# Altium PCB RP2040.PcbDoc
Units mm, origin at the board's own origin, x right, y up, seen from the top; angles counter-clockwise.
Board outline 27.31 x 37.21 mm, 2 copper layers (Top Layer, Bottom Layer); 48 components, 57 nets, 201 pads, 36 vias.
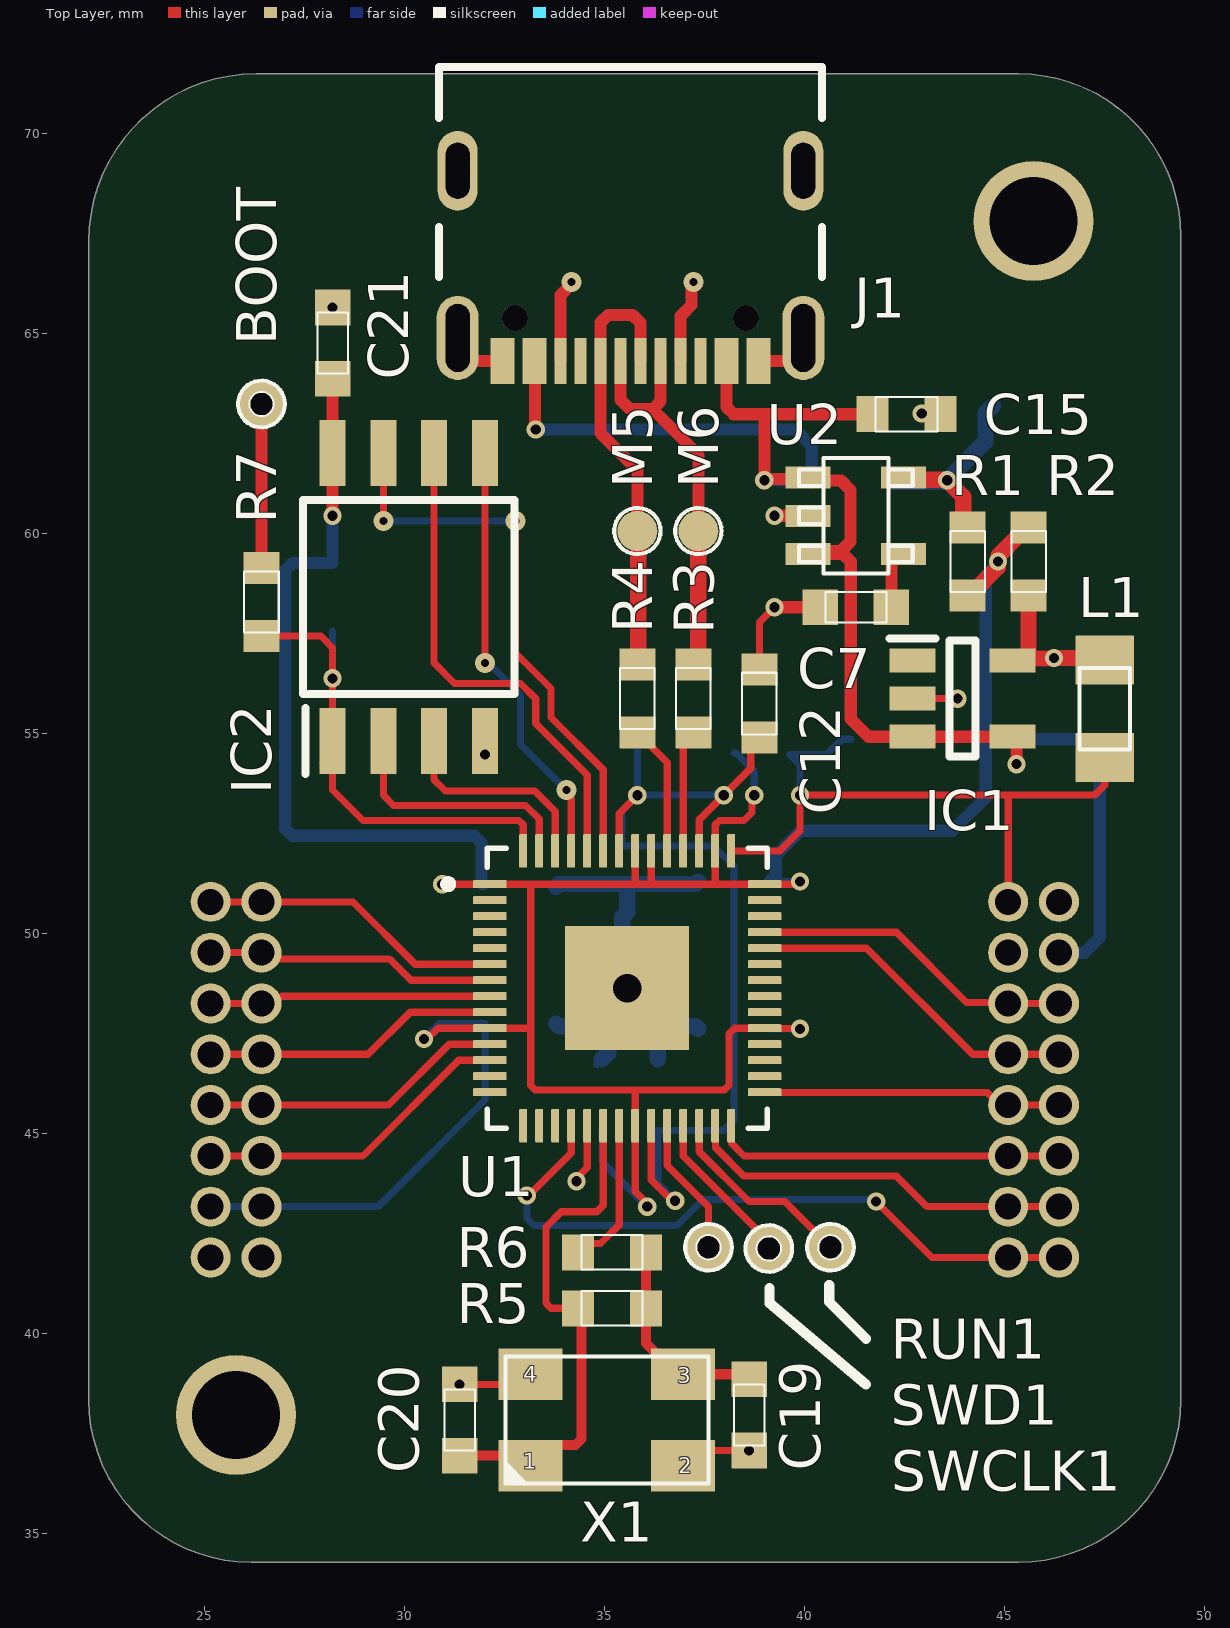
[diagram p0: Top Layer view]
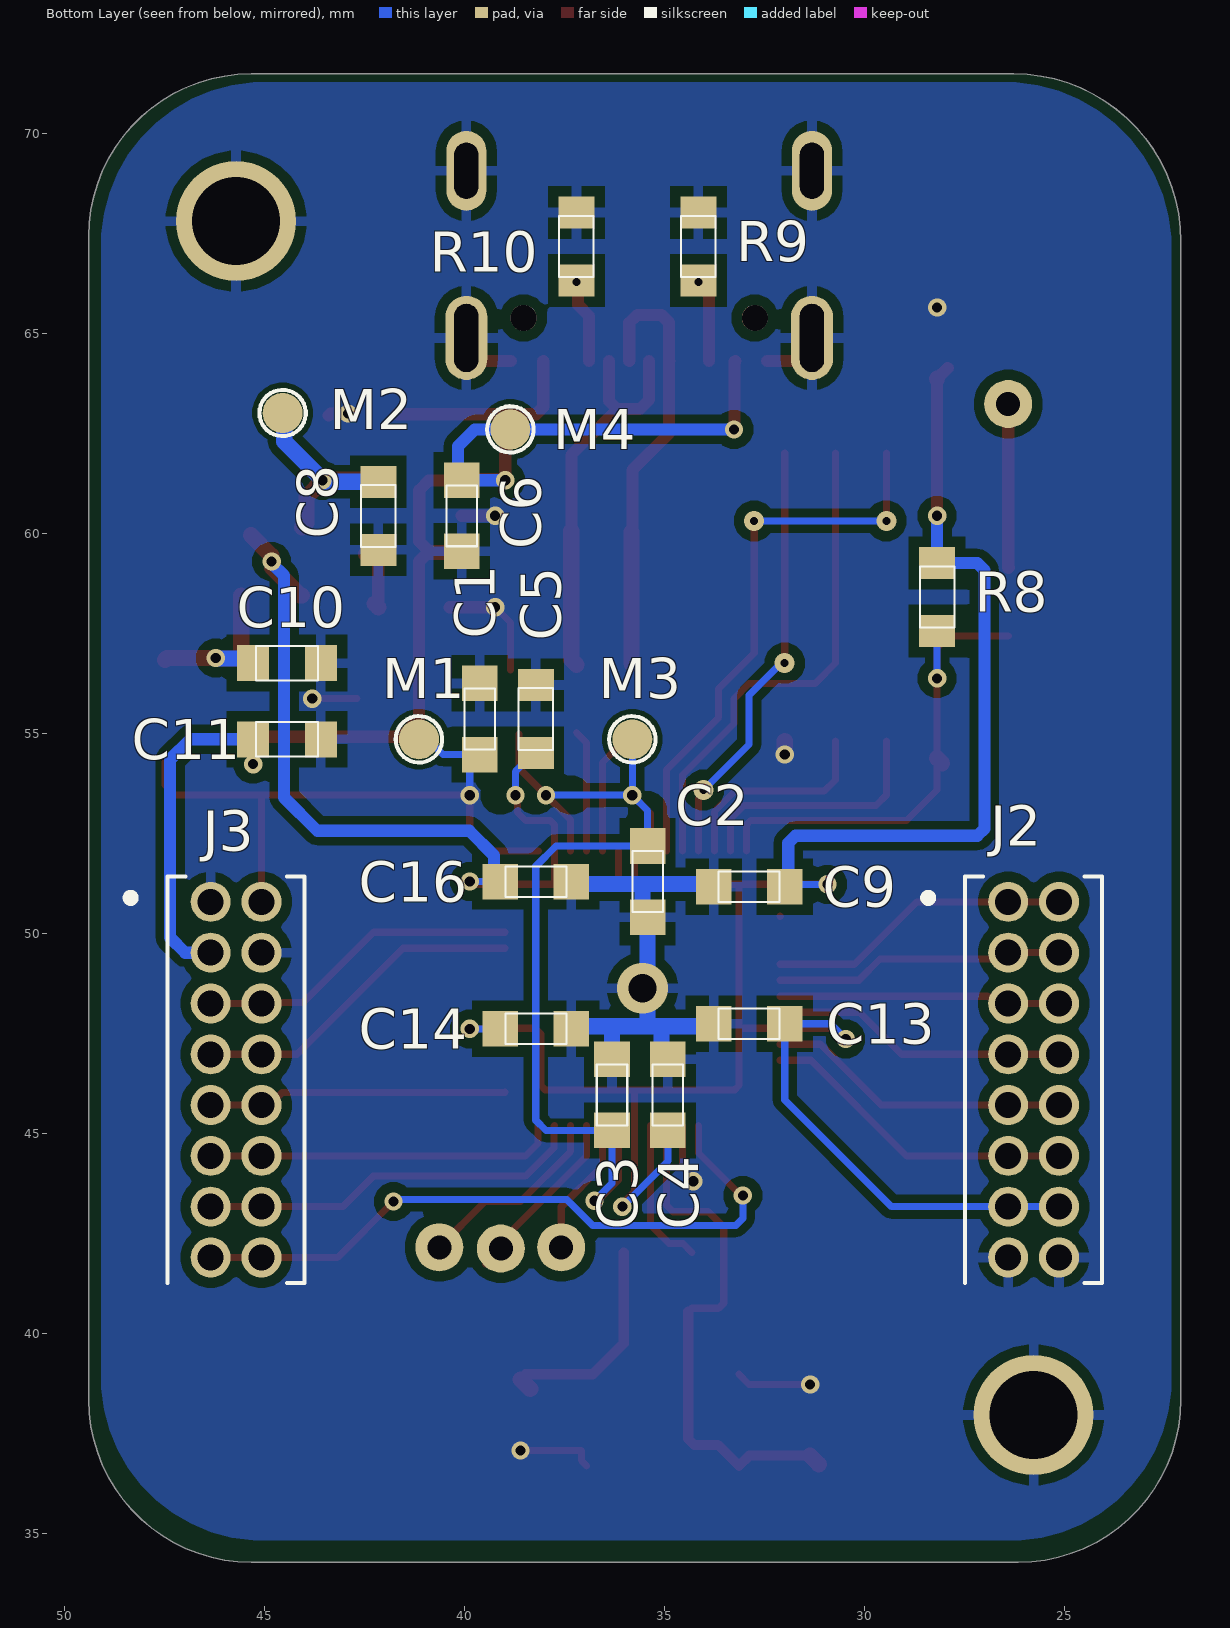
[diagram p1: Bottom Layer view, seen from below]
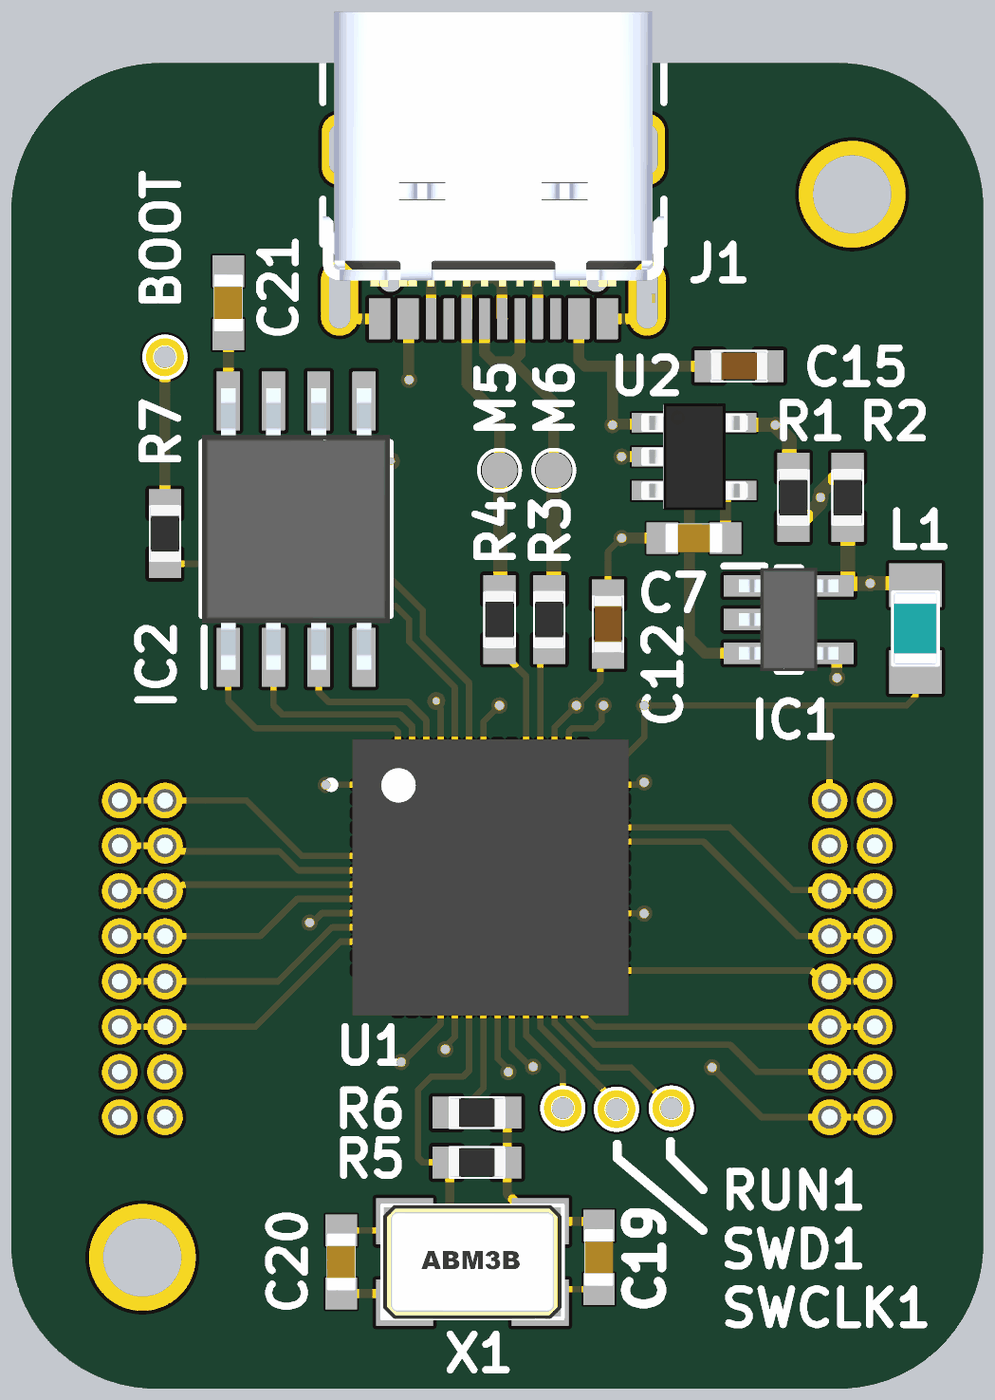
[diagram p2: 3D render of the assembled board from above, using the file's embedded part models]
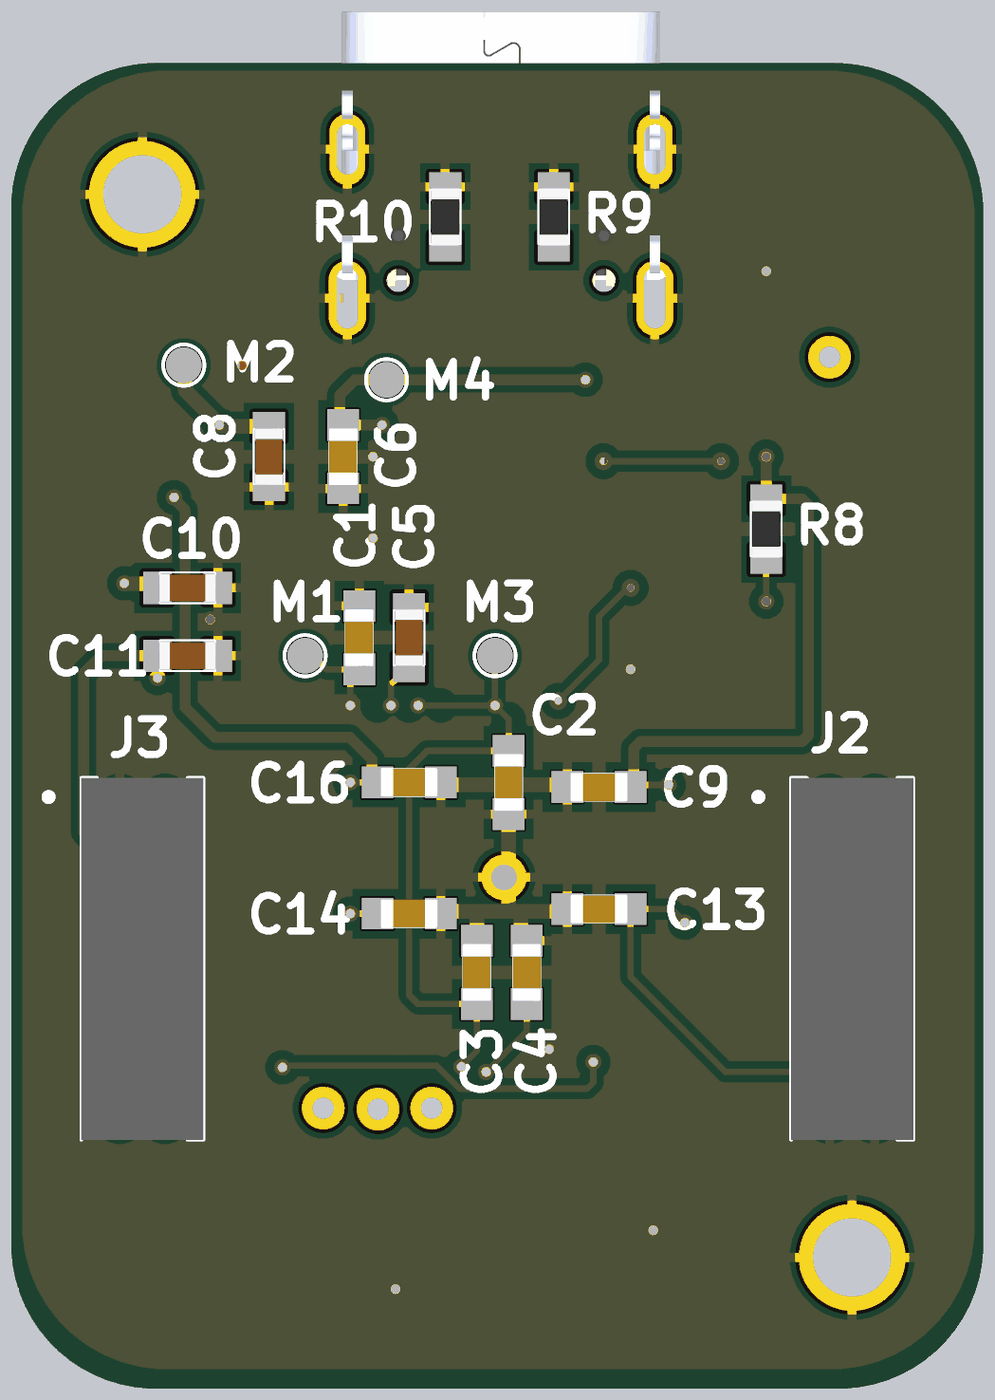
[diagram p3: 3D render of the assembled board from below, using the file's embedded part models]

## Layer stack, top to bottom
Top Solder: solder mask 0.0102, Solder Resist, Dk 3.5
Top Layer: signal copper 0.0356
Dielectric 1: dielectric 0.32, FR-4, Dk 4.8
Bottom Layer: signal copper 0.0356
Bottom Solder: solder mask 0.0102, Solder Resist, Dk 3.5

## Board outline
26.289,71.501 45.339,71.501 cw(c45.339,67.437) 49.403,67.437 49.403,38.354 cw(c45.339,38.354) 45.339,34.29 26.162,34.29 cw(c26.162,38.354) 22.098,38.354 22.098,67.31 cw(c26.289,67.31)

## Design rules (kind name [scope] priority, off if disabled: settings)
Clearance [All] p1: gap=0.254 ignorepadtopadclearanceinfootprint=FALSE except(0.127: Arc-Arc Arc-Track Arc-SMDPad Arc-Via Track-Track Track-SMDPad Track-Via SMDPad-SMDPad; 0.203: Arc-Fill Arc-Poly Arc-Region Arc-Text Track-Fill Track-Poly Track-Region Track-Text SMDPad-Text SMDPad-Hole THPad-Text Via-Text Fill-Text Poly-Text Region-Text Text-Text)
HoleSize [All] p1: absolutevalues=TRUE maxlimit=2.54 minlimit=0.254 maxpercent=80.000 minpercent=20.000
PolygonConnect [All] p1: connectstyle=Relief reliefconductorwidth=0.254 reliefentries=4 polygonreliefangle="90 Angle" airgapwidth=0.254
RoutingVias [All] p1: holewidth=0.2 width=0.5 viastyle="Through Hole" minholewidth=0.2 minwidth=0.5 maxholewidth=0.711 maxwidth=1.27
SilkToSilkClearance [All] p1: silktosilkclearance=0.127
SolderMaskExpansion [All] p1: expansion=0.102 istentingtop=FALSE
UnRoutedNet [All] p1: checkbadconnections=TRUE
Width [All] p1: maxlimit=1.016 minlimit=0.127 preferedwidth=0.406 minimp=50.000000 maximp=50.000000 favimp=50.000000
27 further rules are at their usual default settings.

## Components (designator, comment, footprint, x,y, rotation, side; value= is the part's Value field where it differs from the comment)
BOOT "TP" Pad0.6mm 26.416,63.246 r90 top
C1 "100n" C0603M 39.624,55.372 r90 bottom value=100n/16V
C2 "100n" C0603M 35.433,51.308 r270 bottom value=100n/16V
C3 "100n" C0603M 36.322,45.974 r90 bottom value=100n/16V
C4 "100n" C0603M 34.925,45.974 r270 bottom value=100n/16V
C5 "4u7" C0603 38.227,55.372 r270 bottom value=4u7/6,3V
C6 "100n" C0603M 40.081,60.452 r270 bottom value=100n/16V
C7 "10n" C0603M 41.275,58.166 r180 top
C8 "4u7" C0603 42.164,60.452 r270 bottom value=4u7/6,3V
C9 "100n" C0603M 32.893,51.181 r180 bottom value=100n/16V
C10 "4u7" C0603 44.45,56.769 r180 bottom value=4u7/6,3V
C11 "4u7" C0603 44.45,54.864 r180 bottom value=4u7/6,3V
C12 "4u7" C0603 38.862,55.753 r90 top value=4u7/6,3V
C13 "100n" C0603M 32.893,47.752 r180 bottom value=100n/16V
C14 "100n" C0603M 38.227,47.625 r0 bottom value=100n/16V
C15 "4u7" C0603 42.545,62.992 r0 top value=4u7/6,3V
C16 "100n" C0603M 38.227,51.308 r0 bottom value=100n/16V
C19 "27p" C0603M 38.608,37.973 r270 top value=22p
C20 "27p" C0603M 31.369,37.846 r90 top value=22p
C21 "100n" C0603M 28.194,64.77 r90 top value=100n/16V
IC1 "REF4132B30DBVR" SOT95P280X145-5N 43.942,55.88 r0 top
IC2 "W25Q64JVSSIQ" SOIC127P790X216-8N 30.099,58.42 r90 top
J1 "USB4105-GF-A" GCT_USB4105-GF-A 35.642,69.078 r180 top
J2 "20021111-00016T4LF" 2002111100016T4LF 26.416,50.8 r270 bottom locked
J3 "20021111-00016T4LF" 2002111100016T4LF 46.355,50.8 r270 bottom locked
L1 "1000ohm/100MHz" L0805M 47.498,55.626 r270 top
M1 "TP" "Pad 1mm SMD" 41.148,54.864 r180 bottom
M2 "TP" "Pad 1mm SMD" 44.557,63.021 r180 bottom
M3 "TP" "Pad 1mm SMD" 35.814,54.864 r180 bottom
M4 "TP" "Pad 1mm SMD" 38.862,62.611 r180 bottom
M5 "TP" "Pad 1mm SMD" 35.814,60.071 r180 top
M6 "TP" "Pad 1mm SMD" 37.338,60.071 r180 top
R1 "0R" R0603 44.069,59.309 r90 top
R2 "0R" R0603 45.593,59.309 r90 top
R3 "27R" R0603 37.211,55.88 r270 top
R4 "27R" R0603 35.814,55.88 r270 top
R5 "1M" R0603 35.179,40.64 r0 top
R6 "1K" R0603 35.179,42.037 r0 top
R7 "1K" R0603 26.416,58.293 r270 top
R8 "10K" R0603 28.194,58.42 r270 bottom
R9 "5K1" R0603 34.163,67.183 r270 bottom
R10 "5K1" R0603 37.211,67.183 r90 bottom
RUN1 "TP" Pad0.6mm 40.64,42.164 r90 top
SWCLK1 "TP" Pad0.6mm 37.592,42.164 r90 top
SWD1 "TP" Pad0.6mm 39.1,42.134 r90 top
U1 "RP2040" QFN40P700X700X90-57N 35.56,48.641 r0 top
U2 "LP2985AIM5-3.3" SOT23-5 41.275,60.452 r270 top
X1 "12MHz" XTAL_SMD_5032_4PIN 35.052,37.846 r0 top

## Footprints (in the part's own frame and the unit in brackets; to place one, negate y for a bottom-side part, rotate by r counter-clockwise, add the part's x,y. Pads: shape width x height; smd on the part's side, far side on the other; paste and mask are expansions set on the pad)
2002111100016T4LF [mm]
  round 1 hole 0.65: 1(0,0) 2(0,1.27) 3(1.27,0) 4(1.27,1.27) 5(2.54,0) 6(2.54,1.27) 7(3.81,0) 8(3.81,1.27) 9(5.08,0) 10(5.08,1.27) 11(6.35,0) 12(6.35,1.27) 13(7.62,0) 14(7.62,1.27) 15(8.89,0) 16(8.89,1.27)
  silkscreen extent -0.64,-2.1 9.53,2.35, body extent -0.64,-1.08 9.53,2.35, height 5.6
C0603 [mm] "Chip Capacitor 0603"
  rect 0.8x0.9 smd: 1(-0.85,0) 2(0.85,0)
  silkscreen extent -0.77,-0.43 0.77,0.43, body extent -0.8,-0.4 0.8,0.4, height 0.6
C0603M [mil]
  rect 35x35 smd mask+2: 1(-35,0) 2(35,0)
  silkscreen extent -30,-15 30,15, body extent -31,-16 31,16, height 35
GCT_USB4105-GF-A [mm]
  rect 0.6x1.15 smd: A1_B12(-3.2,4.755) A4_B9(-2.4,4.755) B1_A12(3.2,4.755) B4_A9(2.4,4.755)
  rect 0.3x1.15 smd: A5(-1.25,4.755) A6(-0.25,4.755) A7(0.25,4.755) A8(1.25,4.755) B5(1.75,4.755) B6(0.75,4.755) B7(-0.75,4.755) B8(-1.75,4.755)
  oval 1.05x2.1 hole 0.6 slot 1.7 at 90 deg: S1(-4.32,4.18) S4(4.32,4.18)
  oval 1x2 hole 0.6 slot 1.4 at 90 deg: S2(-4.32,0) S3(4.32,0)
  round 0.65 hole 0.65 unplated: ""(-2.89,3.68) ""(2.89,3.68)
  silkscreen extent -4.79,-2.6 4.79,2.65, body extent -4.79,-3.86 4.79,3.86, height 3.31
L0805M [mil] "Chip inductor 0805"
  rect 48x58 smd: 1(-48,0) 2(48,0)
  silkscreen extent -40,-25 40,25, body extent -39,-24 39,24, height 51
Pad0.6mm [mm] "Pad (neosazuje se)"
  round 1.2 hole 0.6: 1(0,0)
  silkscreen extent -0.58,-0.58 0.58,0.58
"Pad 1mm SMD" [mm] "Pad (neosazuje se)"
  round 1 smd mask+0.051: 1(0,0)
  silkscreen extent -0.58,-0.58 0.58,0.58
QFN40P700X700X90-57N [mm]
  rrect25% 0.84x0.2 smd: 1(-3.435,2.6) 2(-3.435,2.2) 3(-3.435,1.8) 4(-3.435,1.4) 5(-3.435,1) 6(-3.435,0.6) 7(-3.435,0.2) 8(-3.435,-0.2) 9(-3.435,-0.6) 10(-3.435,-1) 11(-3.435,-1.4) 12(-3.435,-1.8) 13(-3.435,-2.2) 14(-3.435,-2.6) 29(3.435,-2.6) 30(3.435,-2.2) 31(3.435,-1.8) 32(3.435,-1.4) 33(3.435,-1) 34(3.435,-0.6) 35(3.435,-0.2) 36(3.435,0.2) 37(3.435,0.6) 38(3.435,1) 39(3.435,1.4) 40(3.435,1.8) 41(3.435,2.2) 42(3.435,2.6)
  rrect25% 0.2x0.84 smd: 15(-2.6,-3.435) 16(-2.2,-3.435) 17(-1.8,-3.435) 18(-1.4,-3.435) 19(-1,-3.435) 20(-0.6,-3.435) 21(-0.2,-3.435) 22(0.2,-3.435) 23(0.6,-3.435) 24(1,-3.435) 25(1.4,-3.435) 26(1.8,-3.435) 27(2.2,-3.435) 28(2.6,-3.435) 43(2.6,3.435) 44(2.2,3.435) 45(1.8,3.435) 46(1.4,3.435) 47(1,3.435) 48(0.6,3.435) 49(0.2,3.435) 50(-0.2,3.435) 51(-0.6,3.435) 52(-1,3.435) 53(-1.4,3.435) 54(-1.8,3.435) 55(-2.2,3.435) 56(-2.6,3.435)
  rect 3.1x3.1 smd paste-0.57: 57(0,0)
  silkscreen extent -4.57,-3.5 3.5,3.5, body extent -3.88,-3.88 3.88,3.88, height 0.9
R0603 [mm] "Chip Resistor 0603"
  rect 0.8x0.9 smd: 1(-0.85,0) 2(0.85,0)
  silkscreen extent -0.76,-0.43 0.76,0.43, body extent -0.8,-0.4 0.8,0.4, height 0.4
SOIC127P790X216-8N [mm]
  rect 1.65x0.65 smd: 1(-3.6,1.905) 2(-3.6,0.635) 3(-3.6,-0.635) 4(-3.6,-1.905) 5(3.6,-1.905) 6(3.6,-0.635) 7(3.6,0.635) 8(3.6,1.905)
  silkscreen extent -4.43,-2.64 2.42,2.64, body extent -3.95,-2.64 3.95,2.64, height 2.16
SOT23-5 [mil] "0,95 rozteè, 0,4mm mezera, 2.9x1,6mm"
  rect 21.65x44 smd mask+2: 1(-37.5,-47) 2(0,-47) 3(37.5,-47) 4(37.5,47) 5(-37.5,47)
  silkscreen extent -57,-56 57,56, body extent -59,-58 59,60, height 57
SOT95P280X145-5N [mm]
  rect 1.15x0.6 smd: 1(-1.25,0.95) 2(-1.25,0) 3(-1.25,-0.95) 4(1.25,-0.95) 5(1.25,0.95)
  silkscreen extent -1.83,-1.45 0.33,1.5, body extent -1.4,-1.45 1.4,1.45, height 1.45
XTAL_SMD_5032_4PIN [mil]
  rect 63x51 smd: 1(-75,-45) 2(75,-45) 3(75,45) 4(-75,45)
  silkscreen extent -100,-62 100,62, body extent -98,-63 98,63, height 44

## Part data
BOOT M1 M2 M3 M4 M5 M6 RUN1 SWCLK1 SWD1: library part "M Point", "Test Point", Category=Pads_Pins_Measure_Points, Main=Mechanical, Stock number=--------
C1 C2 C3 C4 C6 C9 C13 C14 C16 C21: library part UniversalCapacitor, "Ceramic Capacitor X7R", Manufacturer=VISHAY, Part Number="100n/16V X7R C0603", Category="Capacitors CERA SMD", Main=Capacitors, SMD/THD=SMD, Status=X, Stock number=10003450
C5 C10 C11 C12 C15: library part UniversalCapacitor, "Ceramic Capacitor X5R", Manufacturer=Murata, Part Number=GRM188R60J475KE19J, Category="Capacitors CERA SMD", ComponentLink1Description=Datasheet, ComponentLink1URL=http://datasheet.octopart.com/GRM188R60J475KE19J-Murata-datasheet-14401031.pdf, Main=Capacitors, SMD/THD=SMD, Status=T, Stock number=10006168
C7: library part UniversalCapacitor, "Ceramic Capacitor X7R", Manufacturer=VISHAY, Part Number="10n/50V X7R C0603", Category="Capacitors CERA SMD", Main=Capacitors, SMD/THD=SMD, Status=A, Stock number=10002497
C8: library part CMP-UN-000401-1, "Ceramic Capacitor X5R", Manufacturer=Murata, Part Number=GRM188R60J475KE19J, Category="Capacitors CERA SMD", ComponentLink1Description=Datasheet, ComponentLink1URL=http://datasheet.octopart.com/GRM188R60J475KE19J-Murata-datasheet-14401031.pdf, Main=Capacitors, SMD/THD=SMD, Status=T, Stock number=10006168
C19 C20: library part UniversalCapacitor, "Ceramic Capacitor NPO", Manufacturer=VISHAY, Part Number="22p/50V NPO C0603", Category="Capacitors CERA SMD", Main=Capacitors, SMD/THD=SMD, Status=A, Stock number=10004609
IC1: "Integrated Circuit", Manufacturer_Name="Texas Instruments", Datasheet Link=https://www.ti.com/lit/ds/symlink/ref4132.pdf?ts=1621337373445&ref_url=https%253A%252F%252Fwww.ti.com%252Fstore%252Fti%252Fen%252Fp%252Fproduct%252F%253Fp%253DREF4132B33DBVR, Height=1.45mm, Manufacturer_Part_Number=REF4132B30DBVR
IC2: "Integrated Circuit", Manufacturer_Name=Winbond, Mouser2 Part Number=454-W25Q64JVSSIQ, Datasheet Link=https://componentsearchengine.com//W25Q64JVSSIQ.pdf, Height=2.16mm, Manufacturer_Part_Number=W25Q64JVSSIQ, Mouser2 Price/Stock=https://www.mouser.com/Search/Refine.aspx?Keyword=454-W25Q64JVSSIQ
J1: "USB-C (USB TYPE-C) USB 2.0 Receptacle Connector 24 (16+8 Dummy) Position Surface Mount, Right Angle; Through Hole", Package=None, Availability=Warning, Check_prices=https://www.snapeda.com/parts/USB4105-GF-A/Global%20Connector%20Technology/view-part/4423780/?ref=eda, MF=GCT, MP=USB4105-GF-A, Price=None, Purchase-URL=https://pricing.snapeda.com/search/part/USB4105-GF-A/?ref=eda, SnapEDA_Link=https://www.snapeda.com/parts/USB4105-GF-A/Global%20Connector%20Technology/view-part/4423780/?ref=snap
J2 J3: "Connector", Manufacturer_Name=Amphenol, Datasheet Link=https://cdn.amphenol-icc.com/media/wysiwyg/files/drawing/20021111.pdf, Height=5.5mm, Manufacturer_Part_Number=20021111-00016T4LF
L1: library part UniversalInductor, "Ferrite Bead (10 to 200MHz) 0.5A", Manufacturer=TDK, Part Number=MMZ2012R102A, Category="Ferrite Beads", ComponentLink1Description=Datasheet, ComponentLink1URL=http://www.farnell.com/datasheets/84901.pdf, Main=Inductors, SMD/THD=SMD, Status=A, Stock number=10005111
R1: library part CMP-UN-002043-2, "Resistor 1%, 0.1W, 75V", Manufacturer=VISHAY, Part Number="0R R0603", Category="Resistors SMD", Main=Resistors, SMD/THD=SMD, Status=A, Stock number=10005433
R2: library part UniversalResistor, "Resistor 1%, 0.1W, 75V", Manufacturer=VISHAY, Part Number="0R R0603", Category="Resistors SMD", Main=Resistors, SMD/THD=SMD, Status=A, Stock number=10005433
R3 R4: library part UniversalResistor, "Resistor 1%, 0.1W, 75V", Manufacturer="YAGEO (PHYCOMP)", Part Number="27R R0603", Category="Resistors SMD", Main=Resistors, SMD/THD=SMD, Status=A, Stock number=10005475
R5: library part UniversalResistor, "Resistor 1%, 0.1W, 75V", Manufacturer=VISHAY, Part Number="1M0 R0603", Category="Resistors SMD", Main=Resistors, SMD/THD=SMD, Status=A, Stock number=10004745
R6 R7 R9 R10: library part UniversalResistor, "Resistor 1%, 0.1W, 75V", Manufacturer=VISHAY, Part Number="1K R0603", Category="Resistors SMD", Main=Resistors, SMD/THD=SMD, Status=A, Stock number=10004641
R8: library part UniversalResistor, "Resistor 1%, 0.1W, 75V", Manufacturer=VISHAY, Part Number="10K R0603", Category="Resistors SMD", Main=Resistors, SMD/THD=SMD, Status=A, Stock number=10004622
U1: "RP2040 Raspberry Pi Pico - ARMÂ® CortexÂ®-M0+ MCU 32-Bit Embedded Evaluation Board", Package=Package, Availability="In Stock", Check_prices=https://www.snapeda.com/parts/RP2040/Raspberry%20Pi/view-part/5800506/?ref=eda, MF="Raspberry Pi", MP=RP2040, Price=None, Purchase-URL=https://pricing.snapeda.com/search/part/RP2040/?ref=eda, SnapEDA_Link=https://www.snapeda.com/parts/RP2040/Raspberry%20Pi/view-part/5800506/?ref=snap
U2: library part LP2985_SOT25, "150-mA , Low-Dropout Regulator", Manufacturer="Texas Instruments", Part Number=LP2985AIM5-3.3/NOPB, Category="Voltage Regulators", ComponentLink1Description=Datasheet, ComponentLink1URL=http://www.farnell.com/datasheets/1972829.pdf, Main=IC's, SMD/THD=SMD, Status=N, Stock number=10006099
X1: library part Symbol, "Crystal Resonator", Manufacturer=Geyer, Part Number="12.000MHz KX-9A", Category=Crystals, Main=Crystals

## Free pads (board coordinates)
  round 3 hole 2.2: 1(25.781,37.973) 2(45.72,67.818)

## Via types
v1: diameter 0.457, hole 0.254, Top Layer to Bottom Layer, tented both sides, 29 vias
v2: diameter 0.5, hole 0.2, Top Layer to Bottom Layer, tented both sides, 6 vias
v3: diameter 1.27, hole 0.711, Top Layer to Bottom Layer, 1 vias

## Nets (pads, with @x,y where several pads share a name; then routed paths per layer and width w, separated by ;. In a path a pad name is that pad's centre, name@x,y a point inside that pad or via, vN(x,y) a via of type N, cw(c..) or ccw(c..) an arc to the next point about the centre after c; other vN are vias at no path point)
+1.1V: C2.1 C3.1 C12.1 M3.1 U1.23 U1.45 U1.50 | length 25.5
  Top Layer w0.178: U1.50 35.36,53.013 v1(35.814,53.467) ; U1.23 36.16,43.85 36.682,43.328 v1(36.758,43.328) ; U1.45 37.36,52.854 38.647,54.141 C12.1@38.647,54.991
  Bottom Layer w0.178: M3.1 v1(35.814,53.467) ; v1(36.758,43.328) 36.322,43.764 C3.1 37.973,45.085 38.227,45.339 38.227,51.689 37.719,52.197 C2.1 35.433,53.086 v1(35.814,53.467) ; v1(37.973,53.467) 36.511,53.467 v1(35.814,53.467)
+3.3V: C4.2 C5.2 C9.2 C13.2 C14.2 C16.2 C21.1 IC2.8 J2.13 J2.14 R1.1 R2.2 R8.1 U1.1 U1.10 U1.22 U1.33 U1.42 U1.44 U1.48 U1.49 | length 83.8
  Top Layer w0.178: v1(30.48,47.371) 30.556,47.371 30.826,47.641 U1.10 33.147,47.641 ; v1(30.937,51.239) v1(30.937,51.239) 32.124,51.24 U1.1 33.147,51.241 ; U1.49 35.76,51.296 35.814,51.241 ; v1(36.062,43.18) 36.062,43.256 35.76,43.558 U1.22 35.76,46.101 ; U1.48 36.16,51.276 36.195,51.241 ; 37.778,51.253 37.76,51.272 37.76,52.728 37.864,52.832 38.481,52.832 38.682,53.033 38.682,53.414 v1(38.735,53.467) ; v1@39.735,51.241 U1.42 37.76,51.241 36.195,51.241 ; v1(39.878,47.625) 39.87,47.633 39.003,47.633 U1.33 38.243,47.641 38.1,47.498 38.1,46.205 37.996,46.101 35.76,46.101 ; 33.147,47.641 33.147,51.241 ; 33.147,47.641 33.147,46.205 33.251,46.101 35.76,46.101 ; 33.147,51.241 35.814,51.241 ; 35.814,51.241 36.195,51.241
  Top Layer w0.305: C21.1@27.927,64.148 C21.1 IC2.8 v1(28.194,60.452)
  Top Layer w0.406: R1.1 44.119,58.459 44.821,59.161 44.821,59.299 v1(44.831,59.309) 44.841,59.319 44.841,59.457 R2.2@45.346,59.962
  Bottom Layer w0.178: J2.14 J2.13 29.337,43.18 32.004,45.847 C13.2 30.861,47.752 v1(30.48,47.371) ; v1(30.937,51.239) 31.946,51.239 C9.2 ; C4.2 34.925,44.317 v1(36.062,43.18) ; C5.2 38.277,54.522 38.735,54.064 v1(38.735,53.467) ; C14.2 v1(39.878,47.625) ; C16.2 v1(39.878,51.308)
  Bottom Layer w0.305: v1(28.194,60.452) R8.1 27.191,59.27 27.012,59.091 27.012,52.63 27.191,52.451 31.737,52.451 31.916,52.272 31.916,51.269 C9.2@31.946,51.239 ; C16.2 39.272,51.464 39.272,51.959 39.891,52.578 43.688,52.578 44.522,53.412 44.522,58.959 44.831,59.268 v1(44.831,59.309)
GND: C1.2 C2.2 C3.2 C4.1 C5.1 C6.2 C7.2 C8.2 C9.1 C10.2 C11.2 C12.2 C13.1 C14.1 C15.2 C16.1 C19.2 C20.2 C21.2 IC1.2 IC2.4 J1.A1_B12 J1.B1_A12 J1.S1 J1.S2 J1.S3 J1.S4 J2.15 J2.16 J3.1 J3.4 pad.1 pad.2 R9.1 R10.2 U1.19 U1.57 U2.2 X1.2 X1.4 | length 26.8
  Top Layer w0.178: J1.S4 31.322,64.726 J1.S4@31.725,64.323 ; v1(31.369,38.735) 32.893,38.735 X1.4 ; v1(34.29,43.815) 34.29,43.891 34.56,44.16 U1.19 ; X1.2 37.084,36.83 37.084,37.084 v1(38.608,37.084) ; C12.2 38.862,57.785 v1(39.243,58.166) ; J1.S1@39.559,64.323 39.962,64.726 J1.S1 ; IC1.2 v1(43.815,55.88) ; J3.4@44.974,49.641 J3.4
  Top Layer w0.3: J1.S4@31.725,64.323 J1.B1_A12 ; J1.A1_B12 J1.S1@39.559,64.323
  Top Layer w0.305: v1(39.243,58.166) C7.2 ; v1(39.243,60.452) U2.2 ; v1(42.922,63.011) 42.932,63.002 43.36,63.002 C15.2@43.405,62.957
  Top Layer w0.406: v1(32.004,54.483) IC2.4
  Bottom Layer w0.178: C4.1@34.798,46.736 C4.1
  Bottom Layer w0.406: C13.1 33.845,47.688 35.084,47.688 ; C9.1 33.845,51.244 35.56,51.244 ; C4.1 35.084,47.022 35.084,47.688 ; C3.2 36.322,47.688 ; C14.1 37.274,47.688 36.322,47.688 ; C16.1 37.274,51.244 35.56,51.244 ; 35.084,47.688 35.433,47.688 ; 35.433,47.689 C2.2 35.56,50.546 35.56,51.244 ; 35.433,47.688 36.322,47.688
  other v1: 28.194,65.659
  other v3: 35.56,48.641
NetBOOT_1: BOOT.1 R7.1 | length 4.1
  Top Layer w0.305: R7.1@26.397,59.163 R7.1 BOOT.1
NetC7_1: C7.1 U2.4 | length 1.7
  Top Layer w0.305: C7.1 U2.4@42.164,59.428
  Top Layer w0.406: C7.1 C7.1@42.253,58.255 ; U2.4@42.164,59.428 42.236,59.499 U2.4
NetC8_1: C8.1 M2.1 R1.2 U2.5 | length 6.3
  Top Layer w0.406: U2.5 42.522,61.351 43.551,61.351 v1(43.561,61.341) 43.561,61.327 43.958,60.931 43.958,60.27 R1.2
  Bottom Layer w0.406: C8.1 43.508,61.302 43.547,61.341 v1(43.561,61.341) 43.561,61.355 44.514,62.308 44.514,63.015 M2.1@44.704,63.206
NetC10_1: C10.1 IC1.5 L1.1 R2.1 | length 4.9
  Top Layer w0.406: IC1.5 45.248,56.886 IC1.5@45.523,56.886 ; R2.1 45.593,56.956 IC1.5@45.523,56.886 ; L1.1 47.447,56.896 v1(46.228,56.896) 46.218,56.886 IC1.5@45.523,56.886
  Bottom Layer w0.406: C10.1 45.417,56.886 46.218,56.886 v1(46.228,56.896)
NetC19_1: C19.1 R5.2 R6.2 X1.3 | length 5.6
  Top Layer w0.254: R6.2 R5.2 36.029,39.765 36.805,38.989 X1.3 38.481,38.989 C19.1
  Top Layer w0.406: C19.1@38.367,38.621 C19.1
NetC20_1: C20.1 R5.1 U1.20 X1.1 | length 13.4
  Top Layer w0.178: R5.1@34.417,40.552 R5.1 33.655,40.64 33.528,40.767 33.528,42.672 33.909,43.053 34.798,43.053 34.96,43.215 U1.20
  Top Layer w0.254: C20.1 32.893,36.957 X1.1 33.668,37.224 34.268,37.224 34.417,37.372 R5.1@34.417,40.552
  Top Layer w0.406: C20.1@31.154,36.742 C20.1
NetIC2_1: IC2.1 R7.2 R8.2 U1.56 | length 12.6
  Top Layer w0.178: R7.2 27.901,57.443 28.194,57.15 v1(28.194,56.388) IC2.1 28.194,54.39 28.194,53.594 28.956,52.832 32.856,52.832 32.96,52.728 U1.56
  Top Layer w0.406: IC2.1@28.072,54.268 IC2.1@28.194,54.39
  Bottom Layer w0.178: v1(28.194,56.388) R8.2
NetIC2_2: IC2.2 U1.55 | length 6.3
  Top Layer w0.178: IC2.2 29.464,53.467 29.718,53.213 33.02,53.213 33.36,52.873 U1.55
NetIC2_3: IC2.3 U1.54 | length 5.3
  Top Layer w0.178: IC2.3 30.734,53.848 31.014,53.568 33.247,53.568 33.76,53.055 U1.54
NetIC2_5: IC2.5 U1.53 | length 10.9
  Top Layer w0.178: v2(32.004,56.769) IC2.5 ; v2(34.036,53.594) 34.036,53.507 34.16,53.383 U1.53
  Bottom Layer w0.178: v2(32.004,56.769) 32.091,56.769 32.893,55.967 32.893,54.737 v2(34.036,53.594)
NetIC2_6: IC2.6 U1.52 | length 12.5
  Top Layer w0.178: IC2.6 30.734,57.023 30.734,56.769 31.242,56.261 32.893,56.261 33.274,55.88 33.274,55.261 34.56,53.975 U1.52
NetIC2_7: IC2.7 U1.51 | length 14.2
  Top Layer w0.178: v2(29.464,60.325) IC2.7 ; v2(32.766,60.325) 32.766,57.023 33.655,56.134 33.655,55.407 34.96,54.102 U1.51
  Bottom Layer w0.178: v2(29.464,60.325) v2(32.766,60.325)
NetJ1_A5: J1.A5 R10.1 | length 2.1
  Top Layer w0.3: J1.A5 36.892,65.444 37.173,65.725 37.173,66.256 v2(37.211,66.294)
  Bottom Layer w0.3: v2(37.211,66.294) R10.1
NetJ1_A6: J1.A6 J1.B6 M5.1 R4.1 | length 11
  Top Layer w0.3: J1.B6 34.892,62.517 35.814,61.595 M5.1
  Top Layer w0.305: J1.B6 34.894,64.325 34.894,65.282 35.086,65.474 35.693,65.474 35.89,65.277 35.89,64.325 J1.A6
  Top Layer w0.406: R4.1@35.836,56.752 M5.1@35.836,60.049
NetJ1_A7: J1.A7 J1.B7 M6.1 R3.1 | length 10.1
  Top Layer w0.3: J1.A7 35.392,63.356 35.629,63.119 36.195,63.119 ; J1.B7 36.392,63.316 36.195,63.119 ; M6.1 37.338,61.976 36.195,63.119
  Top Layer w0.406: R3.1 37.338,56.857 M6.1
NetJ1_B5: J1.B5 R9.2 | length 2.1
  Top Layer w0.3: J1.B5 33.892,65.969 34.163,66.24 v2(34.163,66.294)
  Bottom Layer w0.3: v2(34.163,66.294) R9.2
NetJ2_1: J2.1 J2.2 U1.6 | length 7.6
  Top Layer w0.178: J2.2 J2.1 28.702,50.8 30.261,49.241 U1.6
NetJ2_3: J2.3 J2.4 U1.7 | length 7.3
  Top Layer w0.178: J2.4 J2.3 26.573,49.373 29.621,49.373 30.153,48.841 U1.7
NetJ2_5: J2.5 J2.6 U1.8 | length 7.1
  Top Layer w0.178: J2.6 J2.5 26.573,48.417 26.908,48.417 26.931,48.441 U1.8
NetJ2_7: J2.7 J2.8 U1.9 | length 7.4
  Top Layer w0.178: J2.8 J2.7 29.083,46.99 30.134,48.041 U1.9
NetJ2_9: J2.9 J2.10 U1.11 | length 7.6
  Top Layer w0.178: J2.10 J2.9 29.591,45.72 31.112,47.241 U1.11
NetJ2_11: J2.11 J2.12 U1.12 | length 8
  Top Layer w0.178: J2.12 28.956,44.45 31.347,46.841 U1.12
NetJ3_5: J3.5 J3.6 U1.39 | length 8.1
  Top Layer w0.178: U1.39 42.288,50.041 44.041,48.288 45.057,48.288 J3.6 J3.5
NetJ3_7: J3.7 J3.8 U1.38 | length 8.5
  Top Layer w0.178: U1.38 41.545,49.641 44.196,46.99 J3.8 J3.7
NetJ3_9: J3.9 J3.10 U1.29 | length 7.5
  Top Layer w0.178: U1.29 39.006,46.03 44.57,46.03 44.88,45.72 J3.10 J3.9
NetJ3_11: J3.11 J3.12 U1.28 | length 8.8
  Top Layer w0.178: U1.28 38.171,45.195 38.171,44.76 38.481,44.45 J3.12 J3.11
NetJ3_13: J3.13 J3.14 U1.27 | length 9.8
  Top Layer w0.178: U1.27 37.771,45.195 37.771,44.652 38.481,43.942 42.291,43.942 43.053,43.18 J3.14 J3.13
NetJ3_15: J3.15 J3.16 U1.18 | length 17.1
  Top Layer w0.178: v1(33.051,43.459) 33.1,43.459 34.16,44.519 U1.18 ; v1(41.783,43.307) 43.18,41.91 J3.15
  Bottom Layer w0.178: v1(33.051,43.459) 33.051,42.887 33.228,42.71 36.804,42.71 37.452,43.357 41.733,43.357 v1(41.783,43.307)
NetR3_2: R3.2 U1.46 | length 3.1
  Top Layer w0.178: U1.46 36.96,54.779 R3.2
NetR4_2: R4.2 U1.47 | length 3.3
  Top Layer w0.178: R4.2 36.56,54.284 U1.47
NetR6_1: R6.1 U1.21 | length 3.8
  Top Layer w0.178: R6.1 34.55,42.258 34.892,42.258 35.36,42.726 U1.21
NetRUN1_1: RUN1.1 U1.26 | length 4.9
  Top Layer w0.178: U1.26 37.36,44.555 38.608,43.307 39.497,43.307 RUN1.1
NetSWCLK1_1: SWCLK1.1 U1.24 | length 3.5
  Top Layer w0.178: U1.24 36.56,44.212 37.592,43.18 SWCLK1.1
NetSWD1_1: SWD1.1 U1.25 | length 4.2
  Top Layer w0.178: U1.25 36.96,44.447 39.1,42.307 SWD1.1 ; SWD1.1@39.285,41.949 SWD1.1@39.481,41.753
NetU1_2: U1.2 | length 0
  Top Layer w0.178: U1.2@32.114,50.83 U1.2
NetU1_3: U1.3 | length 0
  Top Layer w0.178: U1.3@32.114,50.43 U1.3
NetU1_4: U1.4
NetU1_5: U1.5
NetU1_13: U1.13
NetU1_14: U1.14
NetU1_15: U1.15
NetU1_16: U1.16
NetU1_17: U1.17
NetU1_30: U1.30
NetU1_31: U1.31
NetU1_32: U1.32
NetU1_34: U1.34
NetU1_35: U1.35
NetU1_36: U1.36
NetU1_37: U1.37
NetU1_40: U1.40
NetU1_41: U1.41
VBUS: C6.1 C11.1 C15.1 IC1.3 IC1.4 J1.A4_B9 J1.B4_A9 J3.3 M4.1 U2.1 U2.3 | length 40.9
  Top Layer w0.305: J1.B4_A9 33.258,64.307 33.258,62.627 v1(33.274,62.611) ; J1.A4_B9 38.042,63.171 38.22,62.992 38.989,62.992 ; U2.3 40.957,59.499 41.148,59.309 41.148,55.372 41.59,54.93 IC1.3 IC1.4 45.294,54.828 v1(45.294,54.243) ; U2.3@40.153,59.571 40.905,59.571 41.143,59.809 41.143,61.092 40.902,61.333 U2.1@40.153,61.333 ; U2.1@40.298,61.527 40.175,61.404 U2.1 40.047,61.37 39.018,61.37 v1(38.989,61.341) 38.989,62.992 ; C15.1 38.989,62.992
  Top Layer w0.406: U2.3 U2.3@40.153,59.571 ; U2.1 U2.1@40.153,61.333
  Bottom Layer w0.305: v1(33.274,62.611) M4.1 39.751,62.611 40.171,62.191 40.171,61.431 C6.1 ; v1(38.989,61.341) 39.878,61.341 C6.1@39.98,61.443 ; v1(45.294,54.243) 45.297,54.246 45.297,54.861 C11.1 46.863,54.864 47.371,54.356 47.371,49.911 46.99,49.53 J3.3
VREF: C1.1 J3.2 L1.2 M1.1 U1.43 | length 16.7
  Top Layer w0.178: U1.43 39.376,52.076 39.878,52.578 v1(39.878,53.467) 45.085,53.467 ; J3.2 45.085,53.467 ; L1.2 47.498,53.721 47.244,53.467 45.085,53.467
  Bottom Layer w0.178: v1(39.878,53.467) 39.878,54.229 C1.1 40.544,54.483 40.925,54.864 M1.1
pads on no net: IC1.1 J1. J1.A8 J1.B8

## Polygon pours and split planes (outlines as drawn)
GND on Bottom Layer "GND_L02_P000" (solid, pour order 0): 49.091,67.222 49.091,38.901 cw(c45.027,38.901) 45.027,34.837 26.358,34.837 cw(c26.358,38.849) 22.346,38.849 22.346,67.147 cw(c26.485,67.147) 26.485,71.286 45.027,71.286 cw(c45.027,67.222)

## Silkscreen, mask and mechanical layers (free items; w line width, h text height)
Top Overlay:
  lines w0.254: 39.116,41.148 39.116,40.767 41.529,38.735 ; 40.617,41.225 40.611,41.218 40.611,40.796 41.529,39.878
Mechanical 13:
  text "GPIO4" at 19.253,50.43 h1
  text "VREF" at 49.631,50.165 h1
  text "GND" at 52.268,50.176 h1
  text "GPIO5" at 19.25,49.287 h1
  text "USB_5V" at 52.3,49.2 h1
  text "GND" at 49.728,49.16 h1
  text "GPIO6" at 19.252,47.89 h1
  text "GPIO27" at 49.738,47.89 h1
  text "GPIO7" at 19.252,46.62 h1
  text "GPIO26" at 49.738,46.62 h1
  text "GPIO8" at 19.252,45.477 h1
  text "GPIO18" at 49.737,45.477 h1
  text "GPIO9" at 19.252,44.207 h1
  text "GPIO17" at 49.738,44.207 h1
  text "+3V3" at 19.563,42.938 h1
  text "GPIO16" at 49.738,42.937 h1
  text "GND" at 19.629,41.54 h1
  text "GPIO15" at 49.735,41.54 h1

## Text inside footprints (layer, text, board x,y; h text height)
X1: Top Overlay "3" at 36.805,38.76 h0.4; Top Overlay "2" at 36.83,36.512 h0.4; Top Overlay "4" at 32.956,38.798 h0.4; Top Overlay "1" at 32.944,36.627 h0.4